# EAGLE board mach89% (EAGLE 5.10)
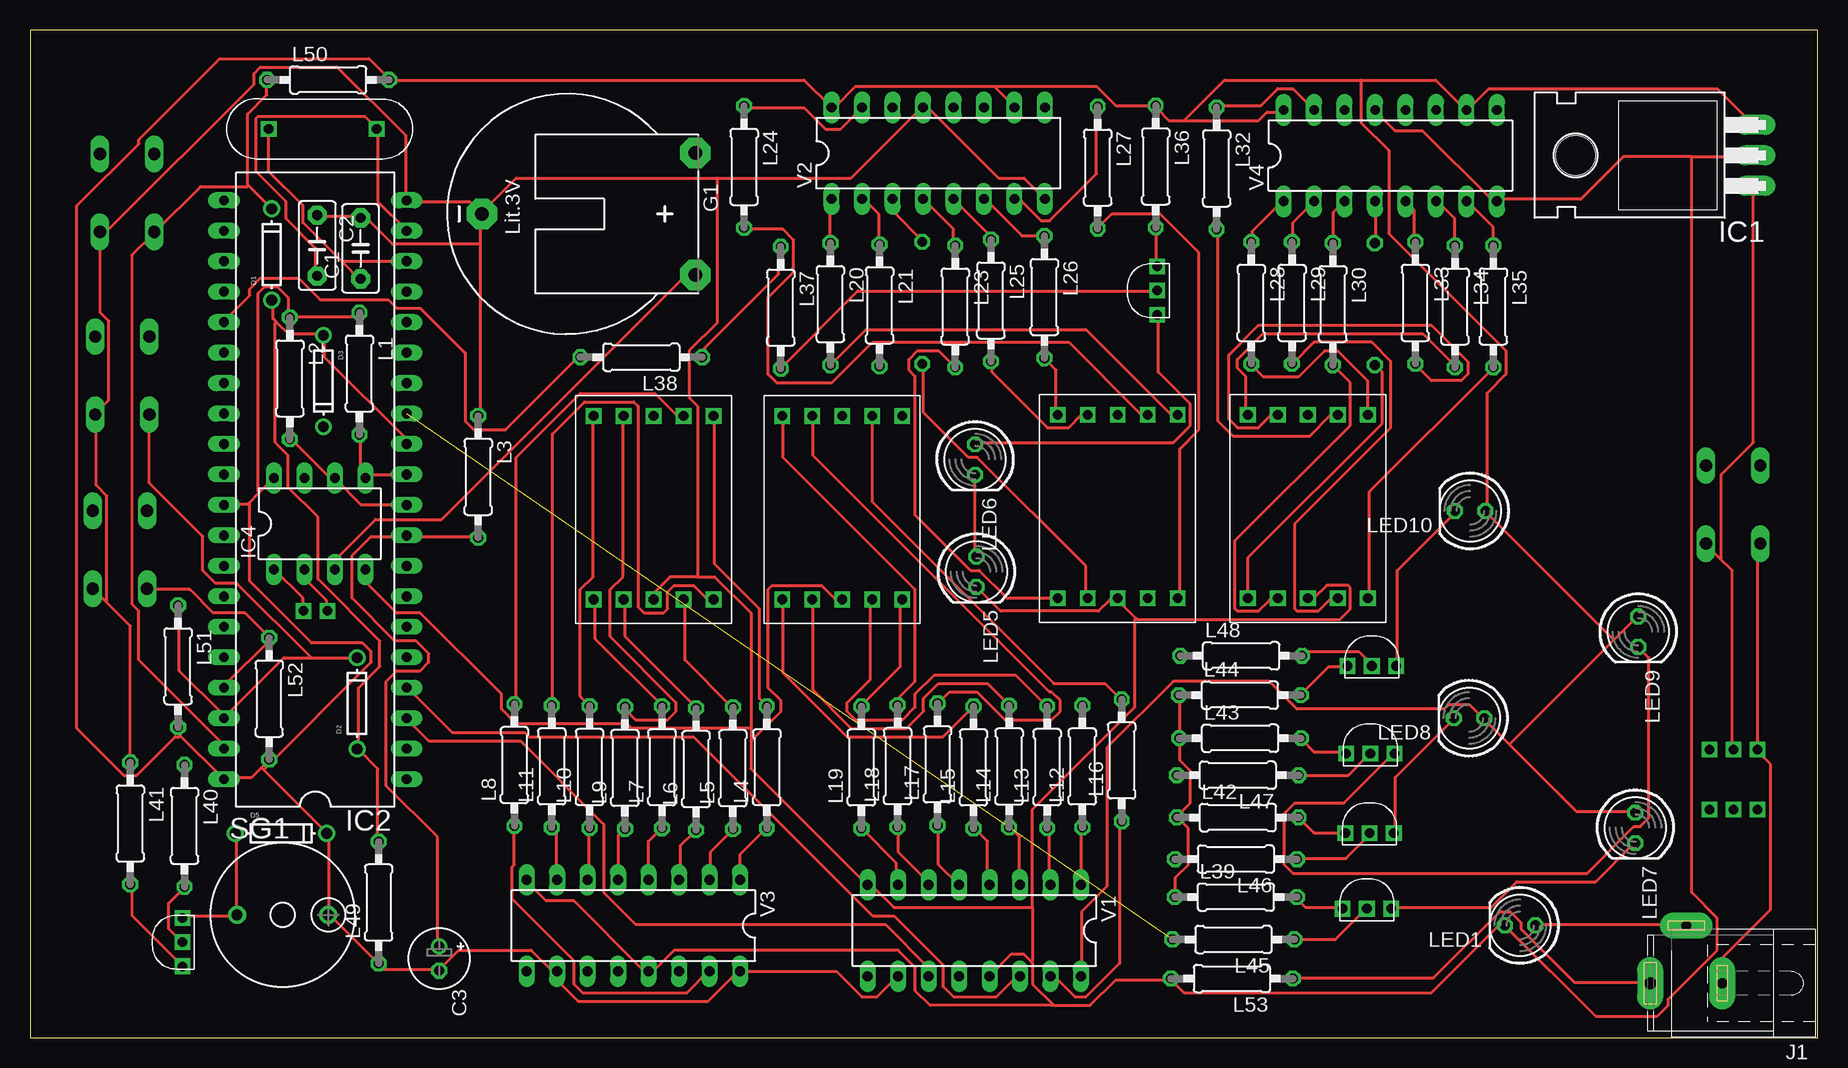
[diagram p0: board, top side]
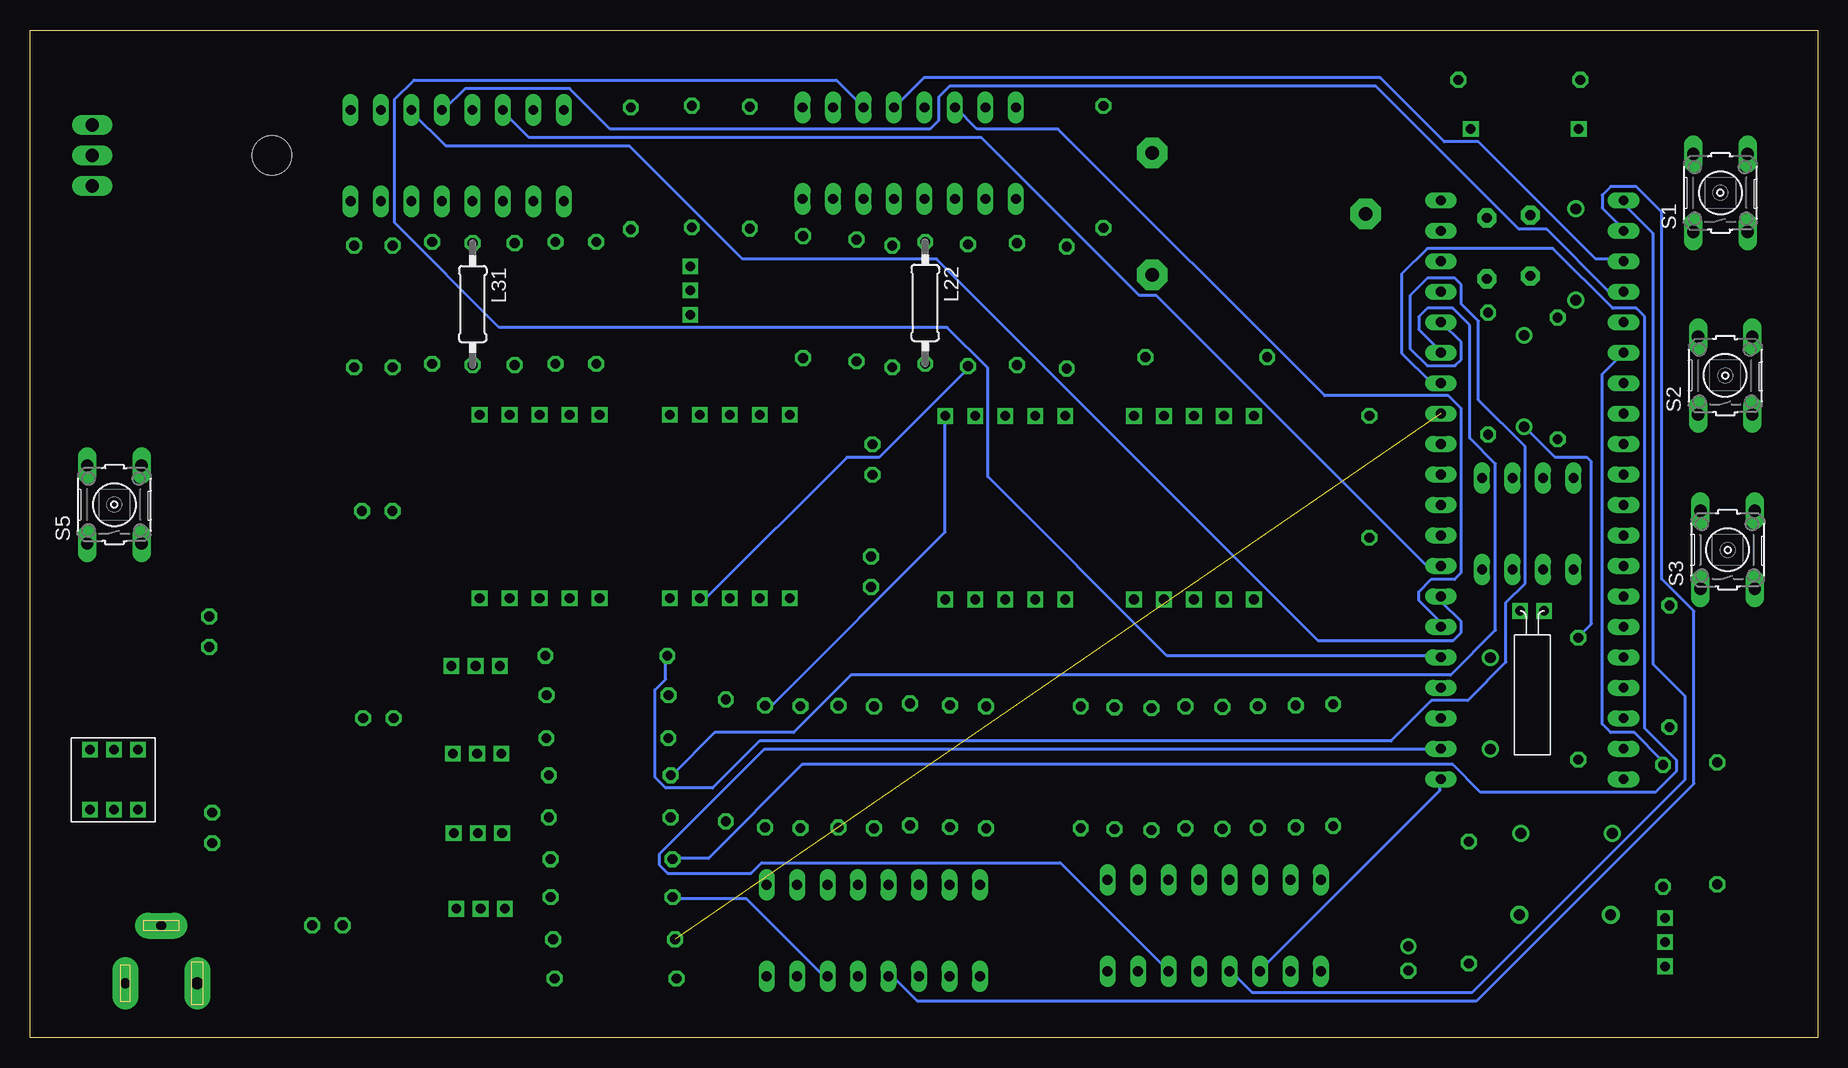
[diagram p1: board, bottom side, seen from below]

Size 149 x 84 mm. Coordinates in mm from the lower left corner, seen from the top.
Outline: 0,0 149,0 149,84 0,84 0,0
Copper layers (1*16): Top 0.035mm / dielectric 1.5mm / Bottom 0.035mm
Design rules "default *": minimum track width 10mil, minimum drill 30mil, track to track 15mil, track to pad 10mil, pad to pad 10mil, via to via 10mil, smd to smd 8mil, copper to edge 40mil, drill to drill 15mil, minimum pad ring 10mil, minimum via ring 8mil, stop-mask expansion 4mil, vias tented up to drill 0mil, thermal gap 10mil

## Footprints (pad centres in the part's own frame; a part is rotated, then mirrored left to right if it is on the bottom)
C5B3 = drill 0.813 pad 1.6 octagon: 1 -2.54,0; 2 2.54,0
E2-5 = drill 0.813 pad 1.27 round: + -1.016,0 | drill 0.813 pad 1.27 octagon: - 1.016,0
DO-1N4148 = drill 0.9 round: A -3.81,0; C 3.81,0
CR2032H = drill 1.118 pad 2.54 octagon: + 5.08,10.795; +@1 -5.08,10.795; - 0,-6.985
TO220H = drill 1.118 long: 1 -2.54,-10.16; 2 0,-10.16; 3 2.54,-10.16 | hole 3.302: 0,4.826
DIL40 = drill 0.813 long: 1 -24.13,-7.62; 2 -21.59,-7.62; 3 -19.05,-7.62; 4 -16.51,-7.62; 5 -13.97,-7.62; 6 -11.43,-7.62; 7 -8.89,-7.62; 8 -6.35,-7.62; 9 -3.81,-7.62; 10 -1.27,-7.62; 11 1.27,-7.62; 12 3.81,-7.62; 13 6.35,-7.62; 14 8.89,-7.62; 15 11.43,-7.62; 16 13.97,-7.62; 17 16.51,-7.62; 18 19.05,-7.62; 19 21.59,-7.62; 20 24.13,-7.62; 21 24.13,7.62; 22 21.59,7.62; 23 19.05,7.62; 24 16.51,7.62; 25 13.97,7.62; 26 11.43,7.62; 27 8.89,7.62; 28 6.35,7.62; 29 3.81,7.62; 30 1.27,7.62; 31 -1.27,7.62; 32 -3.81,7.62; 33 -6.35,7.62; 34 -8.89,7.62; 35 -11.43,7.62; 36 -13.97,7.62; 37 -16.51,7.62; 38 -19.05,7.62; 39 -21.59,7.62; 40 -24.13,7.62
DIL08 = drill 0.813 long: 1 -3.81,-3.81; 2 -1.27,-3.81; 3 1.27,-3.81; 4 3.81,-3.81; 5 3.81,3.81; 6 1.27,3.81; 7 -1.27,3.81; 8 -3.81,3.81
SPC4077 = drill 0.8 pad 2.184 long: 1 -3,0; 2 0,-4.8 | drill 1 pad 2.184 long: 3 3,0
0207/10 = drill 0.813 octagon: 1 -5.08,0; 2 5.08,0
LED5MM = drill 0.813 octagon: A -1.27,0; K 1.27,0
B3F-10XX = drill 1.016 long: 1 -3.251,2.261; 2 3.251,2.261; 3 -3.251,-2.261; 4 3.251,-2.261
BMT1205XH7.5 = drill 0.9 pad 1.5 round: + 3.8,0; - -3.8,0
7SEG13X19 = drill 0.8 square: P$1 11.5,-1.7; P$2 9,-1.7; P$3 6.5,-1.7; P$4 4,-1.7; P$5 1.5,-1.7; P$6 11.5,-17; P$7 9,-17; P$8 6.5,-17; P$9 4,-17; P$10 1.5,-17
XTAL12MHZ = drill 0.8 square: P$1 9.5,-2.5; P$2 0.5,-2.5
XTAL32KHZMINI = drill 0.8 square: P$1 0.5,-12; P$2 2.5,-12
PUSKLOCKBUTTON = drill 0.8 square: P$1 5.04,0; P$2 3.04,0; P$3 1.04,0; P$4 1.04,-5; P$5 3.04,-5; P$6 5.04,-5
C9014 = drill 0.8 square: P$1 0.23,1; P$2 2.25,1; P$3 4.27,1
DIL16 = drill 0.813 long: 1 -8.89,-3.81; 2 -6.35,-3.81; 3 -3.81,-3.81; 4 -1.27,-3.81; 5 1.27,-3.81; 6 3.81,-3.81; 7 6.35,-3.81; 8 8.89,-3.81; 9 8.89,3.81; 10 6.35,3.81; 11 3.81,3.81; 12 1.27,3.81; 13 -1.27,3.81; 14 -3.81,3.81; 15 -6.35,3.81; 16 -8.89,3.81

## Placement (x,y rotation side)
C1  [C5B3]  27.56,65.79 90 top
C2  [C5B3]  23.94,66.03 270 top
C3  [E2-5]  34.11,6.59 270 top
D1  [DO-1N4148]  20.14,65.28 90 top
D2  [DO-1N4148]  27.26,27.86 90 top
D3  [DO-1N4148]  24.46,54.73 270 top
D5  [DO-1N4148]  20.92,17.02 0 top
G1  CR2032H  [CR2032H]  44.66,68.66 270 top
IC1  7805T  [TO220H]  133.66,73.55 90 top
IC2  AT89C51-12PC  [DIL40]  23.78,45.67 90 top
IC4  ds1307  [DIL08]  24.15,42.83 0 top
J1  [SPC4077]  138.06,4.52 180 top
L1  [0207/10]  27.46,55.35 270 top
L2  [0207/10]  21.66,54.95 270 top
L3  [0207/10]  37.36,46.75 270 top
L4  [0207/10]  61.42,22.53 90 top
L5  [0207/10]  58.59,22.45 90 top
L6  [0207/10]  55.51,22.37 90 top
L7  [0207/10]  52.68,22.53 90 top
L8  [0207/10]  40.38,22.71 90 top
L9  [0207/10]  49.59,22.47 90 top
L10  [0207/10]  46.65,22.55 90 top
L11  [0207/10]  43.49,22.6 90 top
L12  [0207/10]  87.72,22.6 90 top
L13  [0207/10]  84.79,22.54 90 top
L14  [0207/10]  81.61,22.59 90 top
L15  [0207/10]  78.64,22.52 90 top
L16  [0207/10]  91,23.1 90 top
L17  [0207/10]  75.65,22.77 90 top
L18  [0207/10]  72.32,22.62 90 top
L19  [0207/10]  69.3,22.52 90 top
L20  [0207/10]  66.72,61.15 270 top
L21  [0207/10]  70.82,61.05 270 top
L22  [0207/10]  74.38,61.25 270 bottom
L23  [0207/10]  77.12,60.95 270 top
L24  [0207/10]  59.53,72.58 270 top
L25  [0207/10]  80.1,61.45 270 top
L26  [0207/10]  84.56,61.74 270 top
L27  [0207/10]  89,72.53 270 top
L28  [0207/10]  101.8,61.25 270 top
L29  [0207/10]  105.2,61.25 270 top
L30  [0207/10]  108.6,61.15 270 top
L31  [0207/10]  112.1,61.15 270 bottom
L32  [0207/10]  98.91,72.46 270 top
L33  [0207/10]  115.48,61.25 270 top
L34  [0207/10]  118.78,60.95 270 top
L35  [0207/10]  121.98,60.95 270 top
L36  [0207/10]  93.84,72.62 270 top
L37  [0207/10]  62.58,60.85 270 top
L38  [0207/10]  50.95,56.72 180 top
L39  [0207/10]  100.51,11.71 0 top
L40  [0207/10]  12.88,17.65 270 top
L41  [0207/10]  8.36,17.85 270 top
L42  [0207/10]  100.68,18.35 0 top
L43  [0207/10]  100.88,24.96 0 top
L44  [0207/10]  100.85,28.55 0 top
L45  [0207/10]  100.31,8.18 180 top
L46  [0207/10]  100.52,14.87 180 top
L47  [0207/10]  100.67,21.87 180 top
L48  [0207/10]  100.96,31.82 0 top
L49  [0207/10]  29.06,11.25 90 top
L50  [0207/10]  24.85,79.84 0 top
L51  [0207/10]  12.34,30.95 270 top
L52  [0207/10]  19.94,28.25 270 top
L53  [0207/10]  100.18,4.91 180 top
LED1  [LED5MM]  124.21,9.35 180 top
LED5  [LED5MM]  78.89,38.83 270 top
LED6  [LED5MM]  78.78,48.19 270 top
LED7  [LED5MM]  133.81,17.48 270 top
LED8  [LED5MM]  119.97,26.63 180 top
LED9  [LED5MM]  134.06,33.83 270 top
LED10  [LED5MM]  120.05,43.9 180 top
S1  [B3F-10XX]  8.09,70.42 90 bottom
S2  [B3F-10XX]  7.69,55.19 90 bottom
S3  [B3F-10XX]  7.49,40.66 90 bottom
S5  [B3F-10XX]  141.97,44.43 90 bottom
SG1  BMT1205XH7.5  [BMT1205XH7.5]  21.05,10.22 0 top
U$1  7SEG13X19  [7SEG13X19]  61.2,53.52 0 top
U$2  7SEG13X19  [7SEG13X19]  84.16,53.62 0 top
U$3  7SEG13X19  [7SEG13X19]  100.02,53.62 0 top
U$4  7SEG13X19  [7SEG13X19]  45.48,53.52 0 top
U$5  XTAL12MHZ  [XTAL12MHZ]  19.4,78.25 0 top
U$6  XTAL32KHZMINI  [XTAL32KHZMINI]  22.29,23.57 180 bottom
U$7  PUSHLOCKBUTON  [PUSKLOCKBUTTON]  145.05,24 0 bottom
U$8  C9014  [C9014]  13.7,5.7 90 top
U$9  C9014  [C9014]  109.41,16.05 0 top
U$10  C9014  [C9014]  109.19,9.73 0 top
U$11  C9014  [C9014]  109.48,22.66 0 top
U$12  C9014  [C9014]  109.6,29.98 0 top
U$13  C9014  [C9014]  94.97,60.03 90 top
V1  74595N  [DIL16]  78.71,8.91 180 top
V2  74595N  [DIL16]  75.71,73.73 0 top
V3  74595N  [DIL16]  50.29,9.33 180 top
V4  74595N  [DIL16]  113.39,73.53 0 top

## Library data of the parts
C1 C2 = capacitor-wima
C3 = rcl
D1-D3 D5 = microbuilder
G1 = battery
IC1 = linear
IC2 = atmel
IC4 = ic-package
J1 = con-jack
L1-L53 = resistor
LED1 LED5-LED10 = led
S1-S3 S5 = switch-omron
SG1 = buzzer
U$1-U$4 = 7seg13x19
U$5 = xtal12mhz
U$6 = Xtal32khzmini
U$7 = pushlockbutton
U$8-U$13 = C9014
V1-V4 = 74ttl-din

## Nets
N$1: IC2.11 IC4.5 L1.2
N$2: IC2.10 IC4.6 L2.2
N$3: IC4.1 U$6.P$1
N$4: C3.+ IC2.9 L3.2
N$5: G1.+ IC4.3
N$6: IC4.2 U$6.P$2
N$7: C2.2 IC2.19 U$5.P$1
N$8: C1.1 IC2.18 U$5.P$2
N$9: D1.C IC2.39 L50.1 S1.1
N$10: IC2.25 L38.2
N$11: IC2.1 V3.11
N$12: IC2.2 V3.14
N$13: IC2.3 V1.11
N$14: IC2.4 L39.1 L42.1 L43.1 L44.1 V1.14
N$15: IC2.5 V2.11
N$16: L9.2 U$4.P$4
N$17: IC2.6 V2.14
N$18: IC2.7 V4.11
N$19: IC2.8 V4.14
N$20: L4.1 V3.1
N$21: L8.1 V3.15
N$22: L7.2 U$4.P$10
N$23: L9.1 V3.5
N$24: L10.1 V3.6
N$25: L4.2 U$4.P$1
N$26: L11.1 V3.7
N$27: L6.1 V3.3
N$28: L7.1 V3.4
N$29: L5.1 V3.2
N$32: L10.2 U$4.P$5
N$34: L11.2 U$4.P$6
N$35: L37.1 L38.1
N$36: L15.2 U$1.P$10
N$37: L13.1 V1.2
N$38: L14.1 V1.3
N$39: L15.1 V1.4
N$41: L17.1 V1.5
N$42: L18.2 U$1.P$5
N$43: L18.1 V1.6
N$44: L16.1 V1.15
N$45: L16.2 U$1.P$2
N$47: L13.2 U$1.P$7
N$48: L14.2 U$1.P$9
N$51: L19.2 U$1.P$6
N$52: J1.1 S5.1 U$7.P$3
N$53: L37.2 U$13.P$2
N$54: L23.2 U$2.P$10
N$55: L27.1 V2.7
N$56: L25.1 V2.5
N$57: L26.1 V2.6
N$58: L27.2 U$2.P$6
N$59: L23.1 V2.4
N$60: L21.1 V2.2
N$61: L20.1 V2.1
N$62: L24.1 V2.15
N$63: L24.2 U$2.P$2
N$64: L20.2 U$2.P$1
N$65: L21.2 U$2.P$7
N$66: L22.2 U$2.P$9
N$67: L25.2 U$2.P$4
N$68: L26.2 U$2.P$5
N$69: L22.1 V2.3
N$70: L31.2 U$3.P$10
N$71: L35.1 V4.7
N$72: L33.1 V4.5
N$73: L34.1 V4.6
N$74: L30.1 V4.3
N$75: L31.1 V4.4
N$76: L29.1 V4.2
N$77: L28.1 V4.1
N$78: L32.1 V4.15
N$79: L32.2 U$3.P$2
N$80: L28.2 U$3.P$1
N$81: L29.2 U$3.P$7
N$82: L30.2 U$3.P$9
N$83: L33.2 U$3.P$4
N$84: L34.2 U$3.P$5
N$85: L35.2 U$3.P$6
N$86: L36.2 U$13.P$3
N$87: LED6.A U$13.P$1
N$88: LED5.A LED6.K
N$89: IC2.26 L40.1
N$90: L40.2 U$8.P$2
N$91: L45.1 U$10.P$2
N$92: L46.1 U$9.P$2
N$93: L47.1 U$11.P$2
N$94: LED7.K U$10.P$3
N$95: D5.A SG1.- U$8.P$3
N$96: D3.C IC2.37 L52.1 S3.1
N$97: L48.2 U$12.P$2
N$98: LED10.K U$12.P$3
N$99: LED9.K U$11.P$3
N$100: L43.2 U$11.P$1
N$101: LED8.K U$9.P$3
N$102: L42.2 U$9.P$1
N$103: L41.2 U$8.P$1
N$104: L44.2 U$12.P$1
N$105: IC2.13 L45.2
N$106: D1.A D2.A D3.A IC2.12 L49.2
N$107: IC2.14 L46.2
N$108: IC2.15 L47.2
N$109: IC2.16 L48.1
N$110: IC2.21 V3.12
N$111: IC2.22 V1.12
N$112: IC2.23 V2.12
N$113: IC2.24 V4.12
N$114: C1.2 C2.1 G1.- IC1.2 IC2.20 IC4.4 L3.1 L41.1 L53.2 LED1.K LED5.K S1.3 S2.3 S3.3 U$1.P$8 U$2.P$8 U$3.P$8 U$4.P$8 V1.8 V1.13 V2.8 V2.13 V3.8 V3.13 V4.8 V4.13
N$115: J1.3 L53.1
N$116: C3.- D5.C IC1.3 IC2.31 IC2.40 IC4.8 L1.1 L2.1 L36.1 L49.1 L50.2 L51.2 L52.2 LED7.A LED8.A LED9.A LED10.A SG1.+ V1.10 V1.16 V2.10 V2.16 V3.10 V3.16 V4.10 V4.16
N$117: D2.C IC2.38 L51.1 S2.1
N$118: J1.2 LED1.A
N$119: IC1.1 S5.3 U$7.P$2
N$120: L8.2 U$4.P$2
N$121: L6.2 U$4.P$9
N$122: L39.2 U$10.P$1
N$123: L17.2 U$1.P$4
N$124: L5.2 U$4.P$7
N$127: L19.1 V1.7
N$128: L12.1 V1.1
N$129: L12.2 U$1.P$1

## Tracks (layer width: path | path; a pad name or v marks a point on that pad's centre or on a via)
N$1
  Top 0.254: L1.2 27.56,50.14 27.56,47.12 27.91,46.76 IC4.5 27.91,46.94 31.29,46.94 IC2.11
N$2
  Top 0.254: L2.2 21.69,49.96 24.89,46.76 25.25,46.76 IC4.6 25.43,46.58 27.56,44.45 31.29,44.45 IC2.10
N$3
  Top 0.254: U$6.P$1 22.76,35.74 22.76,36.63 20.45,38.94 IC4.1
N$4
  Top 0.254: C3.+ 33.96,7.64 33.96,16.71 29.69,20.98 29.69,29.69 30.58,30.58 32.54,30.58 33.25,31.29 33.25,32 32.18,33.07 30.4,33.07 26.85,36.63 26.85,40.18 28.45,41.78 31.29,41.78 IC2.9 31.47,41.78 37.34,41.78 L3.2
N$5
  Top 0.254: IC4.3 25.43,39.12 25.43,39.83 28.8,43.2 34.31,43.2 54.59,63.48 55.3,63.48 G1.+
N$6
  Top 0.254: U$6.P$2 24.71,35.74 24.71,36.45 22.94,38.23 22.94,38.94 IC4.2
N$7
  Top 0.254: IC2.19 31.29,67.39 28.98,69.7 28.98,75.74 U$5.P$1 28.8,75.92 27.91,76.81 19.02,76.81 18.85,76.63 18.85,72.19 21.34,69.7 21.34,68.28 23.82,65.79 23.82,63.65 C2.2
N$8
  Top 0.254: 26.05,64.63 27.56,63.12 C1.1 | 26.05,64.63 22.76,67.92 22.76,69.34 19.91,72.19 19.91,75.74 U$5.P$2 | IC2.18 31.29,64.72 26.14,64.72 26.05,64.63
N$9
  Top 0.254: 18.22,71.03 20.09,69.16 D1.C | 18.22,71.03 18.14,71.12 18.14,76.99 19.74,78.59 19.74,79.83 L50.1 | IC2.39 16,24.18 16,24.54 9.07,31.47 9.07,35.56 8.53,36.09 8.53,65.25 10.31,67.03 S1.1 10.49,67.21 14.22,70.94 18.14,70.94 18.22,71.03
N$10
  Top 0.254: IC2.25 16.18,59.74 18.31,61.87 18.31,62.41 19.2,63.3 22.4,63.3 24.18,61.52 29.87,61.52 30.58,60.81 32.54,60.81 36.27,57.07 36.27,51.38 36.98,50.67 39.65,50.67 45.7,56.72 L38.2
N$11
  Bottom 0.254: IC2.1 31.47,21.51 31.47,20.62 46.41,5.69 V3.11
N$12
  Bottom 0.254: IC2.2 31.47,24 87.83,24 96.55,15.29 96.55,14.4 95.83,13.69 88.9,13.69 88.01,14.58 63.12,14.58 54.23,5.69 V3.14
N$13
  Top 0.254: V1.11 74.85,5.16 74.85,5.87 71.3,9.42 50.49,9.42 47.83,12.09 47.83,17.78 40.89,24.71 33.25,24.71 31.47,26.49 IC2.3
N$14
  Top 0.254: V1.14 82.5,4.98 82.14,4.98 80.54,3.38 76.99,3.38 76.1,4.27 76.1,6.04 72.01,10.13 70.23,10.13 55.3,25.07 41.6,25.07 41.25,25.43 35.2,25.43 31.47,29.16 IC2.4 | L44.1 95.83,28.45 95.83,25.07 L43.1 95.83,24.89 95.83,23.11 96.72,22.23 96.72,19.56 95.66,18.49 L42.1 95.66,18.31 96.55,17.42 96.55,14.4 95.48,13.34 95.48,11.73 L39.1
  Bottom 0.254: L39.1 95.3,11.56 89.26,11.56 82.68,4.98 V1.14
N$15
  Bottom 0.254: IC2.5 31.47,31.83 54.23,31.83 69.16,46.76 69.16,55.83 72.54,59.21 109.88,59.21 118.59,67.92 118.59,78.23 116.99,79.83 81.79,79.83 79.65,77.7 V2.11
N$16
  Top 0.254: U$4.P$4 49.43,51.74 49.43,38.41 48.36,37.34 48.36,33.43 53.87,27.91 53.87,27.2 53.16,26.49 50.49,26.49 49.61,27.38 L9.2
N$17
  Bottom 0.254: IC2.6 31.47,34.31 31.47,34.67 33.25,36.45 33.25,37.16 32.18,38.23 30.23,38.23 29.69,38.76 29.69,52.45 30.76,53.52 41.07,53.52 63.3,75.74 70.05,75.74 71.83,77.52 V2.14
N$18
  Bottom 0.254: IC2.7 31.29,36.63 31.29,36.27 29.69,34.67 29.69,33.78 30.4,33.07 41.6,33.07 73.43,64.9 89.61,64.9 99.03,74.32 114.33,74.32 117.17,77.17 V4.11
N$19
  Bottom 0.254: IC2.8 31.47,39.47 32.72,39.47 55.12,61.87 56.54,61.87 69.7,75.03 107.39,75.03 109.53,77.17 V4.14
N$20
  Top 0.254: V3.1 59.21,13.16 59.21,15.29 61.34,17.42 L4.1
N$21
  Top 0.254: L8.1 40.36,17.6 40.36,14.4 40.18,14.22 40.18,11.56 45.34,6.4 45.34,4.45 46.05,3.73 54.76,3.73 56.54,5.51 V3.15
N$22
  Top 0.254: U$4.P$10 47.12,36.45 47.12,33.25 52.63,27.74 L7.2
N$23
  Top 0.254: V3.5 49.07,13.16 49.07,16.89 49.43,17.25 L9.1
N$24
  Top 0.254: V3.6 46.58,13.16 46.58,17.42 L10.1
N$25
  Top 0.254: U$4.P$1 57.07,51.74 57.07,39.47 60.81,35.74 60.81,28.27 61.34,27.74 L4.2
N$26
  Top 0.254: V3.7 43.92,13.16 43.92,17.07 43.56,17.42 L11.1
N$27
  Top 0.254: V3.3 54.23,13.16 54.23,16 55.47,17.25 L6.1
N$28
  Top 0.254: V3.4 51.56,13.16 51.56,16.36 52.63,17.42 L7.1
N$29
  Top 0.254: V3.2 56.72,13.16 56.72,15.47 58.5,17.25 L5.1
N$32
  Top 0.254: U$4.P$5 46.94,51.74 46.94,38.41 45.87,37.34 45.87,28.45 46.58,27.74 L10.2
N$34
  Top 0.254: U$4.P$6 56.9,36.63 56.36,36.63 55.3,37.69 53.7,37.69 53.16,37.16 53.16,35.74 52.81,35.38 51.21,35.38 50.67,35.92 50.67,52.63 50.32,52.98 46.23,52.98 43.56,50.32 43.56,27.74 L11.2
N$35
  Top 0.254: L38.1 56.19,56.9 56.19,57.43 62.41,63.65 62.41,65.79 L37.1
N$36
  Top 0.254: U$1.P$10 62.76,36.45 62.76,30.4 68.1,25.07 76.1,25.07 78.59,27.56 L15.2
N$37
  Top 0.254: V1.2 84.99,12.8 84.99,17.25 84.81,17.42 L13.1
N$38
  Top 0.254: V1.3 82.5,12.8 82.5,16.71 81.79,17.42 L14.1
N$39
  Top 0.254: V1.4 79.83,12.8 79.83,16.36 78.77,17.42 L15.1
N$41
  Top 0.254: L17.1 75.74,17.6 75.74,14.4 77.34,12.8 V1.5
N$42
  Top 0.254: U$1.P$5 62.76,51.74 62.76,48.36 73.79,37.34 73.79,29.69 72.36,28.27 72.36,27.74 L18.2
N$43
  Top 0.254: L18.1 72.36,17.42 72.36,15.47 75.03,12.8 V1.6
N$44
  Top 0.254: V1.15 85.17,4.98 85.52,4.98 87.12,3.38 88.01,3.38 90.86,6.22 90.86,17.96 L16.1
N$45
  Top 0.254: U$1.P$2 70.23,51.74 70.23,44.63 85.34,29.52 89.61,29.52 90.86,28.27 L16.2
N$47
  Top 0.254: U$1.P$7 70.05,36.45 70.05,29.87 68.1,27.91 68.1,27.2 68.81,26.49 72.72,26.49 73.79,27.56 73.79,28.63 75.39,30.23 82.14,30.23 84.63,27.74 L13.2
N$48
  Top 0.254: U$1.P$9 65.25,36.45 65.25,28.98 68.45,25.78 73.08,25.78 74.5,27.2 74.5,28.27 75.74,29.52 79.83,29.52 81.61,27.74 L14.2
N$51
  Top 0.254: U$1.P$6 72.54,36.45 72.54,30.94 69.34,27.74 L19.2
N$52
  Top 0.254: S5.1 144.2,41.07 144.02,40.89 U$7.P$3 144.02,23.82 145.09,22.76 145.09,10.67 141.17,6.76 141.17,4.62 J1.1
N$53
  Top 0.254: U$13.P$2 93.88,62.23 68.99,62.23 62.59,55.83 L37.2
N$54
  Top 0.254: U$2.P$10 85.52,36.63 81.43,36.63 79.12,38.94 78.41,38.94 73.79,43.56 73.79,55.12 73.25,55.65 73.25,56.54 73.97,57.25 75.74,57.25 76.99,56.01 L23.2
N$55
  Top 0.254: V2.7 82.14,69.88 82.5,69.88 84.28,68.1 84.99,68.1 88.9,72.01 88.9,77.52 L27.1
N$56
  Top 0.254: V2.5 76.99,69.88 80.19,66.67 L25.1
N$57
  Top 0.254: V2.6 79.65,69.88 82.68,66.85 84.45,66.85 L26.1
N$58
  Top 0.254: U$2.P$6 95.83,36.63 95.83,49.07 97.43,50.67 97.43,65.43 94.23,68.63 90.14,68.63 89.08,67.56 L27.2
N$59
  Top 0.254: L23.1 76.99,66.14 76.99,67.39 74.5,69.88 V2.4
N$60
  Top 0.254: L21.1 70.76,66.14 70.76,68.63 69.52,69.88 V2.2
N$61
  Top 0.254: L20.1 66.67,66.32 66.67,69.88 V2.1
N$62
  Top 0.254: L24.1 59.56,77.52 64.54,77.52 66.32,75.74 67.56,75.74 69.34,77.52 V2.15
N$63
  Top 0.254: U$2.P$2 92.99,52.09 92.46,52.09 86.59,57.96 70.23,57.96 66.85,54.59 62.23,54.59 61.52,55.3 61.52,61.7 63.65,63.83 63.65,66.5 62.76,67.39 59.56,67.39 L24.2
N$64
  Top 0.254: U$2.P$1 95.66,52.09 94.94,52.09 88.01,59.03 69.7,59.03 66.85,56.19 L20.2
N$65
  Bottom 0.254: U$2.P$7 92.99,36.63 92.63,36.63 80.9,48.36 78.23,48.36 70.76,55.83 L21.2
N$66
  Top 0.254: U$2.P$9 88.01,36.63 88.01,39.29 78.94,48.36 78.23,48.36 74.5,52.09 74.5,56.01 L22.2
N$67
  Top 0.254: U$2.P$4 88.01,51.92 87.66,51.92 86.59,50.85 84.81,50.85 80.19,55.47 80.19,56.36 L25.2
N$68
  Top 0.254: U$2.P$5 85.52,52.09 85.52,55.65 84.63,56.54 L26.2
N$69
  Top 0.254: V2.3 72.01,69.88 72.01,68.81 74.32,66.5 L22.1
N$70
  Top 0.254: U$3.P$10 101.52,40.01 112.72,51.21 112.72,55.47 112.19,56.01 L31.2
N$71
  Top 0.254: L35.1 121.97,66.14 121.97,67.56 119.84,69.7 V4.7
N$72
  Top 0.254: L33.1 115.39,66.5 115.39,68.99 114.68,69.7 V4.5
N$73
  Top 0.254: L34.1 118.77,66.14 118.77,68.28 117.35,69.7 V4.6
N$74
  Top 0.254: L30.1 108.64,66.32 108.64,68.81 109.53,69.7 V4.3
N$75
  Top 0.254: L31.1 112.19,66.32 112.19,69.7 V4.4
N$76
  Top 0.254: L29.1 105.26,66.5 105.26,67.92 107.04,69.7 V4.2
N$77
  Top 0.254: L28.1 101.88,66.5 101.88,67.21 104.37,69.7 V4.1
N$78
  Top 0.254: L32.1 99.03,77.7 102.59,77.7 104.01,79.12 105.26,79.12 V4.15
N$79
  Top 0.254: U$3.P$2 108.99,51.92 108.46,51.92 106.68,50.14 100.28,50.14 99.03,51.38 99.03,67.21 L32.2
N$80
  Top 0.254: U$3.P$1 111.48,52.09 111.48,54.76 108.99,57.25 107.92,57.25 105.79,55.12 102.77,55.12 101.88,56.01 L28.2
N$81
  Top 0.254: U$3.P$7 108.99,36.45 108.28,36.45 107.39,35.56 105.61,35.56 105.44,35.74 105.44,42.85 113.44,50.85 113.44,56.36 111.84,57.96 107.04,57.96 105.26,56.19 L29.2
N$82
  Top 0.254: U$3.P$9 104.01,36.45 103.3,36.45 102.41,35.56 100.64,35.56 100.46,35.74 100.46,41.43 110.06,51.03 110.06,54.59 108.64,56.01 L30.2
N$83
  Top 0.254: U$3.P$4 103.48,51.92 102.41,50.85 100.64,50.85 99.92,51.56 99.92,56.9 102.41,59.38 116.81,59.38 119.84,56.36 119.84,55.3 119.3,54.76 116.81,54.76 115.57,56.01 L33.2
N$84
  Top 0.254: U$3.P$5 101.35,52.09 101.35,55.12 100.64,55.83 100.64,56.54 102.77,58.67 116.1,58.67 118.77,56.01 L34.2
N$85
  Top 0.254: U$3.P$6 111.66,36.63 111.66,45.52 121.97,55.83 L35.2
N$86
  Top 0.254: U$13.P$3 93.88,64.36 93.88,67.39 L36.2
N$87
  Top 0.254: U$13.P$1 94.06,60.1 94.06,55.47 96.72,52.81 96.72,51.03 95.3,49.61 78.94,49.61 LED6.A
N$88
  Top 0.254: LED6.K 78.77,46.76 78.77,40.18 LED5.A
N$89
  Bottom 0.254: L40.1 12.98,22.76 12.98,23.11 15.29,25.43 17.25,25.43 17.96,26.14 17.96,55.3 16.18,57.07 IC2.26
N$90
  Top 0.254: U$8.P$2 12.62,8 11.56,9.07 11.56,11.2 12.8,12.45 L40.2
N$91
  Top 0.254: U$10.P$2 111.3,10.67 108.81,8.18 105.44,8.18 L45.1
N$92
  Top 0.254: U$9.P$2 111.66,16.89 109.7,14.94 105.61,14.94 L46.1
N$93
  Top 0.254: U$11.P$2 111.66,23.65 109.88,21.87 105.79,21.87 L47.1
N$94
  Top 0.254: U$10.P$3 113.61,10.85 121.79,10.85 123.93,12.98 130.5,12.98 133.71,16.18 LED7.K
N$95
  Top 0.254: U$8.P$3 12.8,10.13 17.25,10.13 SG1.- 17.25,10.31 17.25,16.89 D5.A
N$96
  Top 0.254: IC2.37 16.18,29.34 20.09,33.25 L52.1 19.91,33.43 17.96,35.38 15.29,35.38 13.34,37.34 9.78,37.34 S3.1
  Bottom 0.254: D3.C 24.36,50.85 21.87,48.36 19.2,48.36 18.85,48.01 18.85,34.49 19.91,33.43 L52.1
N$97
  Top 0.254: U$12.P$2 111.84,31.11 110.77,32.18 106.5,32.18 106.15,31.83 L48.2
N$98
  Top 0.254: U$12.P$3 113.97,31.11 113.97,38.94 118.77,43.74 LED10.K
N$99
  Top 0.254: U$11.P$3 113.61,23.65 109.53,19.56 105.44,19.56 104.55,18.67 104.55,14.4 105.26,13.69 129.79,13.69 133.71,17.6 134.24,17.6 134.95,18.31 134.95,31.65 134.06,32.54 LED9.K
N$100
  Top 0.254: U$11.P$1 109.7,23.82 107.04,23.82 105.97,24.89 L43.2
N$101
  Top 0.254: U$9.P$3 113.79,17.07 113.79,21.69 118.59,26.49 LED8.K
N$102
  Top 0.254: U$9.P$1 109.53,17.07 107.04,17.07 105.79,18.31 L42.2
N$103
  Top 0.254: U$8.P$1 12.62,6.04 8.53,10.13 8.53,12.62 L41.2
N$104
  Top 0.254: U$12.P$1 109.7,30.94 108.28,30.94 105.97,28.63 L44.2
N$105  (1 unrouted)
N$106
  Top 0.254: L49.2 28.98,16.36 28.98,22.4 27.38,24 D2.A 27.38,24.18 27.38,29.16 29.16,30.94 29.16,33.07 24,38.23 24,43.38 21.51,45.87 21.51,48.54 20.45,49.61 20.45,59.56 20.54,59.65 | IC2.12 31.29,49.61 31.29,49.96 24.54,56.72 24.54,58.5 D3.A 24.36,58.67 21.51,58.67 20.54,59.65 | 20.54,59.65 20.27,59.92 20.27,61.34 D1.A
N$107
  Bottom 0.254: IC2.14 31.47,54.59 32.18,54.59 34.67,57.07 34.67,63.65 32.54,65.79 22.05,65.79 17.07,60.81 15.11,60.81 14.4,60.1 14.4,25.78 11.73,23.11 11.73,22.23 13.51,20.45 28.09,20.45 30.4,22.76 84.63,22.76 92.46,14.94 95.3,14.94 L46.2
N$108
  Bottom 0.254: IC2.15 31.47,57.25 33.25,59.03 33.25,60.1 32.54,60.81 30.4,60.81 28.98,59.38 28.98,49.96 26.85,47.83 26.85,33.96 30.58,30.23 80.54,30.23 85.34,25.43 91.92,25.43 95.48,21.87 L47.2
N$109
  Bottom 0.254: L48.1 96.01,31.65 96.01,29.87 96.9,28.98 96.9,21.69 96.01,20.8 92.1,20.8 88.19,24.71 35.56,24.71 32.18,28.09 29.16,28.09 25.96,31.29 25.96,36.27 24.36,37.87 24.36,49.25 28.27,53.16 28.27,59.74 29.69,61.16 29.69,62.76 30.23,63.3 32.54,63.3 33.96,61.87 33.96,57.43 32.54,56.01 30.23,56.01 29.69,56.54 29.69,57.96 31.29,59.56 IC2.16
N$110
  Bottom 0.254: IC2.21 16,69.7 16,69.34 13.69,67.03 13.69,31.11 11.02,28.45 11.02,21.51 28.8,3.73 47.12,3.73 48.9,5.51 V3.12
N$111
  Bottom 0.254: V1.12 77.34,4.98 76.99,4.98 75.03,3.02 28.45,3.02 10.31,21.16 10.31,35.56 12.98,38.23 12.98,68.81 15.11,70.94 17.25,70.94 17.96,70.23 17.96,69.16 16.18,67.39 IC2.22
N$112
  Bottom 0.254: IC2.23 16.18,64.9 18.49,64.9 28.27,74.68 31.11,74.68 36.45,80.01 74.5,80.01 76.81,77.7 V2.12
N$113
  Bottom 0.254: IC2.24 16.18,62.23 17.42,62.23 22.58,67.39 24.89,67.39 36.8,79.3 72.36,79.3 73.25,78.41 73.25,76.45 73.97,75.74 100.64,75.74 104.01,79.12 112.72,79.12 114.5,77.34 V4.12
N$114
  Top 0.254: 6.31,36.36 5.33,37.34 S3.3 | 6.31,36.36 8.36,34.31 L41.1 | 6.31,36.36 6.4,36.45 6.4,45.16 5.51,46.05 5.51,51.92 S2.3 5.51,52.09 6.58,53.16 6.58,59.74 5.87,60.45 5.87,67.03 S1.3 5.87,67.21 6.4,67.21 18.67,79.48 18.67,80.37 19.2,80.9 25.6,80.9 31.29,75.21 31.29,69.88 IC2.20 31.47,69.7 36.63,69.7 37.52,68.81 G1.- | V2.8 84.45,70.05 82.86,71.65 80.72,71.65 74.85,77.52 74.5,77.52 V2.13 74.32,77.52 68.45,71.65 57.25,71.65 | C2.1 24,68.45 27.56,68.45 C1.2 27.74,68.28 28.09,68.28 30.23,66.14 37.52,66.14 | 37.52,66.14 37.52,68.63 G1.- | 37.52,66.14 37.52,51.92 L3.1 | 57.25,71.65 40.54,71.65 37.69,68.81 G1.- | 55.65,38.41 57.07,38.41 60.1,35.38 60.1,25.78 | 55.65,38.41 53.34,38.41 52.09,37.16 52.09,36.63 U$4.P$8 | 60.1,24.71 60.1,22.4 69.7,12.8 V1.8 69.88,12.62 70.23,12.62 72.01,10.85 83.57,10.85 | 60.1,25.78 60.1,24.71 | 60.1,24.71 62.59,27.2 62.59,28.09 61.52,29.16 61.52,37.34 61.87,37.69 65.96,37.69 67.03,36.63 67.56,36.63 U$1.P$8 | 60.1,25.78 50.14,25.78 49.78,26.14 40.54,26.14 39.29,27.38 39.29,28.63 32.54,35.38 30.58,35.38 28.09,37.87 28.09,38.94 IC4.4 | V4.13 112.19,77.17 113.79,75.56 116.1,75.56 121.79,69.88 122.15,69.88 V4.8 122.33,69.88 129.26,69.88 132.82,73.43 138.51,73.43 | 138.51,73.43 143.66,73.43 IC1.2 | LED5.K 78.94,37.52 80.9,35.56 89.08,35.56 89.97,36.45 90.5,36.45 U$2.P$8 90.68,36.45 92.19,34.94 | 92.19,34.94 92.28,34.85 109.17,34.85 110.06,35.74 110.06,37.52 109.88,37.69 108.1,37.69 107.04,36.63 106.68,36.63 U$3.P$8 | V3.8 41.43,12.98 43.03,11.38 45.34,11.38 51.03,5.69 51.38,5.69 V3.13 51.56,5.69 52.09,5.69 53.7,7.29 72.36,7.29 73.79,5.87 73.79,3.91 75.03,2.67 85.17,2.67 85.25,2.76
  Top 0.254: 85.25,2.76 83.57,4.45 83.57,6.22 83.48,6.31 | 85.25,2.76 85.34,2.67 88.37,2.67 90.5,4.8 94.94,4.8 L53.2 95.12,4.8 96.19,3.73 116.81,3.73 122.33,9.25 122.86,9.25 LED1.K 123.04,9.25 130.5,1.78 135.66,1.78 136.55,2.67 136.55,3.2 140.64,7.29 140.64,9.96 138.51,12.09 138.51,73.43 | 83.48,6.31 82.86,6.93 81.79,6.93 80.01,5.16 V1.13 | 83.57,10.85 83.57,6.4 83.48,6.31 | 83.57,10.85 83.57,19.02 92.1,27.56 92.1,34.85 92.19,34.94 | 57.25,71.65 57.25,59.56 54.94,57.25 54.94,53.34 55.65,52.63 55.65,38.41
N$115
  Top 0.254: L53.1 105.44,4.98 116.99,4.98 122.5,10.49 123.39,10.49 124.28,9.6 124.28,9.07 128.73,4.62 134.95,4.62 J1.3
N$116
  Top 0.254: L1.1 27.38,60.27 27.2,60.1 21.69,60.1 L2.1 21.51,60.1 21.51,61.7 20.62,62.59 19.56,62.59 19.02,62.05 19.02,45.52 19.11,45.43 | 19.11,45.43 20.27,46.58 IC4.8 | 18.22,44.54 19.11,45.43 | 18.22,44.54 18.14,44.45 16.18,44.45 IC2.31 | V1.10 72.19,4.98 70.59,3.38 69.34,3.38 67.21,5.51 59.21,5.51 V3.16 59.03,5.51 56.54,3.02 45.7,3.02 44.09,4.62 44.09,5.51 V3.10 43.92,5.69 43.38,5.69 41.78,7.29 35.74,7.29 34.14,5.69 C3.- 33.96,5.69 29.52,5.69 29.16,6.04 L49.1 28.98,6.22 24.89,10.31 | 19.29,22.49 19.91,23.11 L52.2 | 19.29,22.49 18.49,21.69 16.18,21.69 IC2.40 16,21.69 12.54,25.16 | 12.54,25.16 12.45,25.25 12.45,25.78 L51.2 | 24.89,10.31 24.89,16.89 D5.C 24.71,17.07 19.47,22.31 | 24.89,10.31 SG1.+ | 19.29,22.49 19.47,22.31 | 18.22,44.54 18.31,44.45 18.31,38.05 23.47,32.89 27.74,32.89 28.45,32.18 28.45,31.29 19.47,22.31 | V1.16 87.66,5.16 87.66,10.49 89.79,12.62 89.79,24.18 95.3,29.69 103.3,29.69 105.61,27.38 117.88,27.38 118.24,27.74 120.02,27.74 121.08,26.67 LED8.A 121.26,26.49 123.3,24.45 | 123.3,24.45 128.91,18.85 133.71,18.85 LED7.A | 132.02,33.16 133.88,35.03 LED9.A | 132.02,33.16 123.3,24.45 | 132.02,33.16 121.44,43.74 LED10.A 121.44,43.92 121.44,53.7 123.04,55.3 123.04,57.25 113.26,67.03 113.26,73.97 110.95,76.28 110.95,79.83 | IC1.3 143.66,76.1 140.64,79.12 121.61,79.12 119.84,77.34 V4.10 119.66,77.34 117.17,79.83 110.95,79.83 | 96.19,76.45 94.94,76.45 93.88,77.52 L36.1 93.7,77.7 90.5,77.7 88.9,79.3 80.54,79.3 80.45,79.21 | 96.19,76.45 102.41,76.45 103.12,77.17 104.37,77.17 V4.16 | 80.45,79.21 81.97,77.7 V2.10 | 80.45,79.21 80.37,79.3 68.81,79.3 67.21,77.7 66.85,77.7 V2.16 66.67,77.7 64.54,79.83 30.05,79.83 L50.2 29.87,80.01 28.27,81.61 15.82,81.61 9.07,74.85 9.07,74.5 3.91,69.34 3.91,25.78 7.82,21.87 8.89,21.87 12.09,25.07 12.45,25.07 12.54,25.16
  Top 0.254: 110.95,79.83 99.57,79.83 96.19,76.45
N$117
  Top 0.254: L51.1 12.45,35.92 12.45,30.58 16,27.03 16,26.67 IC2.38 16.18,26.67 21.16,31.65 23.47,31.65 | 23.47,31.65 27.2,31.65 D2.C | 23.47,31.65 17.25,37.87 15.47,37.87 14.4,38.94 14.4,41.78 9.96,46.23 9.96,51.92 S2.1
N$118
  Top 0.254: LED1.A 125.53,9.42 137.97,9.42 J1.2
N$119
  Top 0.254: 140.91,39.92 139.75,41.07 S5.3 | 140.91,39.92 141.88,38.94 141.88,24 U$7.P$2 | IC1.1 143.66,70.94 143.66,49.61 141,46.94 141,40.01 140.91,39.92
N$120
  Top 0.254: U$4.P$2 54.41,51.92 53.87,51.92 52.09,53.7 45.87,53.7 40.54,48.36 40.54,27.91 L8.2
N$121
  Top 0.254: U$4.P$9 49.61,36.45 49.61,33.43 55.47,27.56 L6.2
N$122
  Top 0.254: U$10.P$1 109.35,10.85 106.32,10.85 105.61,11.56 L39.2
N$123
  Top 0.254: U$1.P$4 65.25,51.74 65.25,48.54 84.99,28.8 85.17,28.8 85.88,28.09 85.88,27.2 85.17,26.49 81.25,26.49 78.94,28.8 76.63,28.8 75.74,27.91 L17.2
N$124
  Top 0.254: U$4.P$7 54.59,36.45 54.59,31.47 58.5,27.56 L5.2
N$127
  Top 0.254: V1.7 72.19,12.8 72.19,14.58 69.34,17.42 L19.1
N$128
  Top 0.254: V1.1 87.66,12.8 87.66,17.42 L12.1
N$129
  Bottom 0.254: U$1.P$1 72.72,51.74 72.72,42.14 87.12,27.74 87.66,27.74 L12.2